# Altium PCB BRAKE PCB PROFILE (Right).PcbDoc
Units mm, origin at the board's own origin, x right, y up, seen from the top; angles counter-clockwise.
Board outline 198.6 x 90.6 mm, 2 copper layers (Top Layer, Bottom Layer); 79 components, 80 nets, 288 pads, 29 vias.
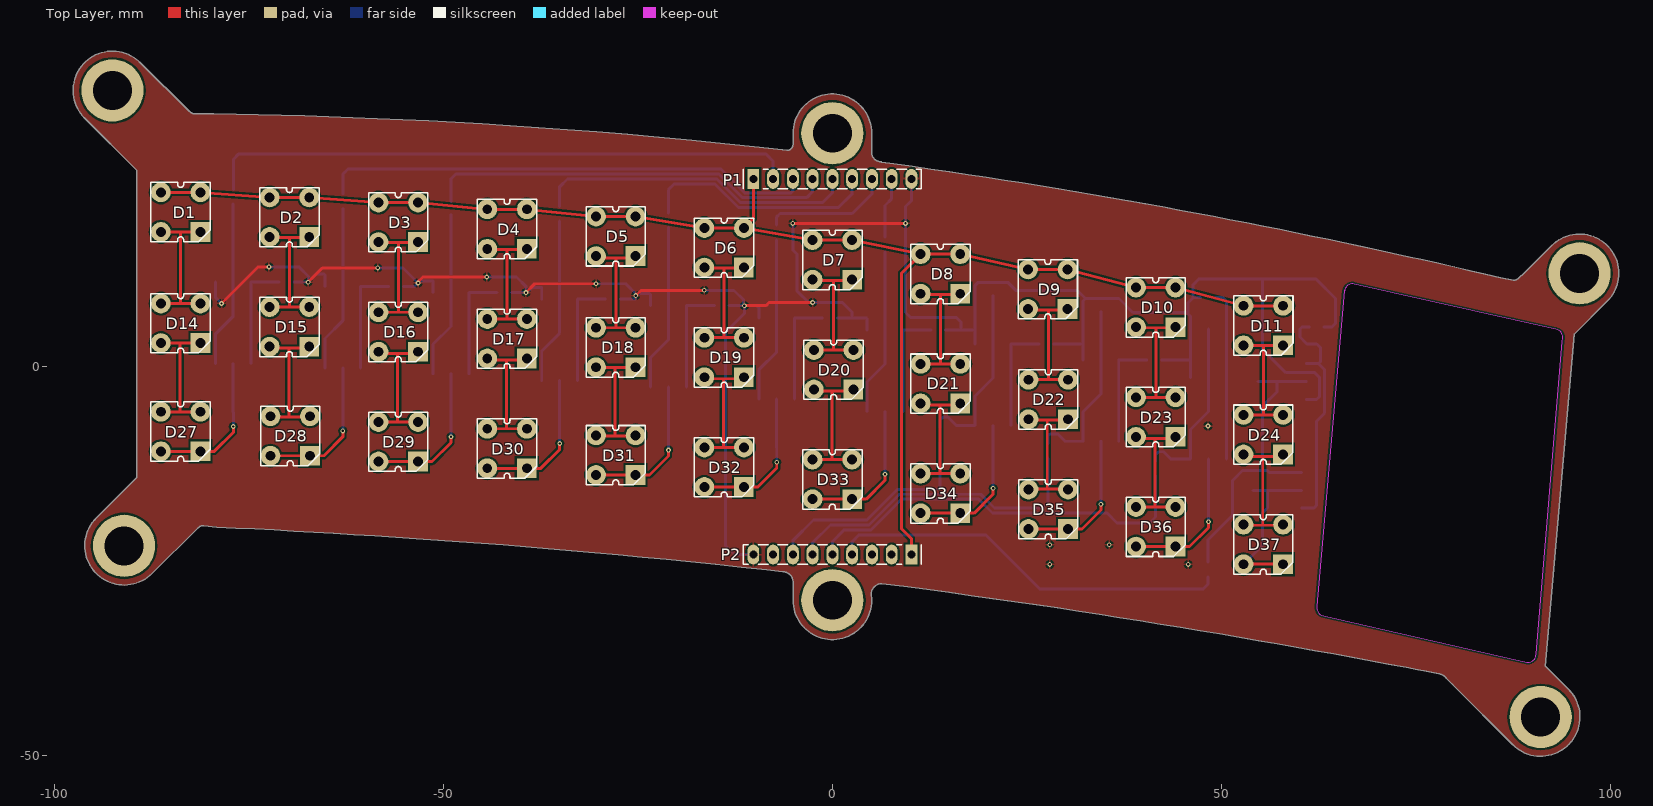
[diagram p0: Top Layer view]
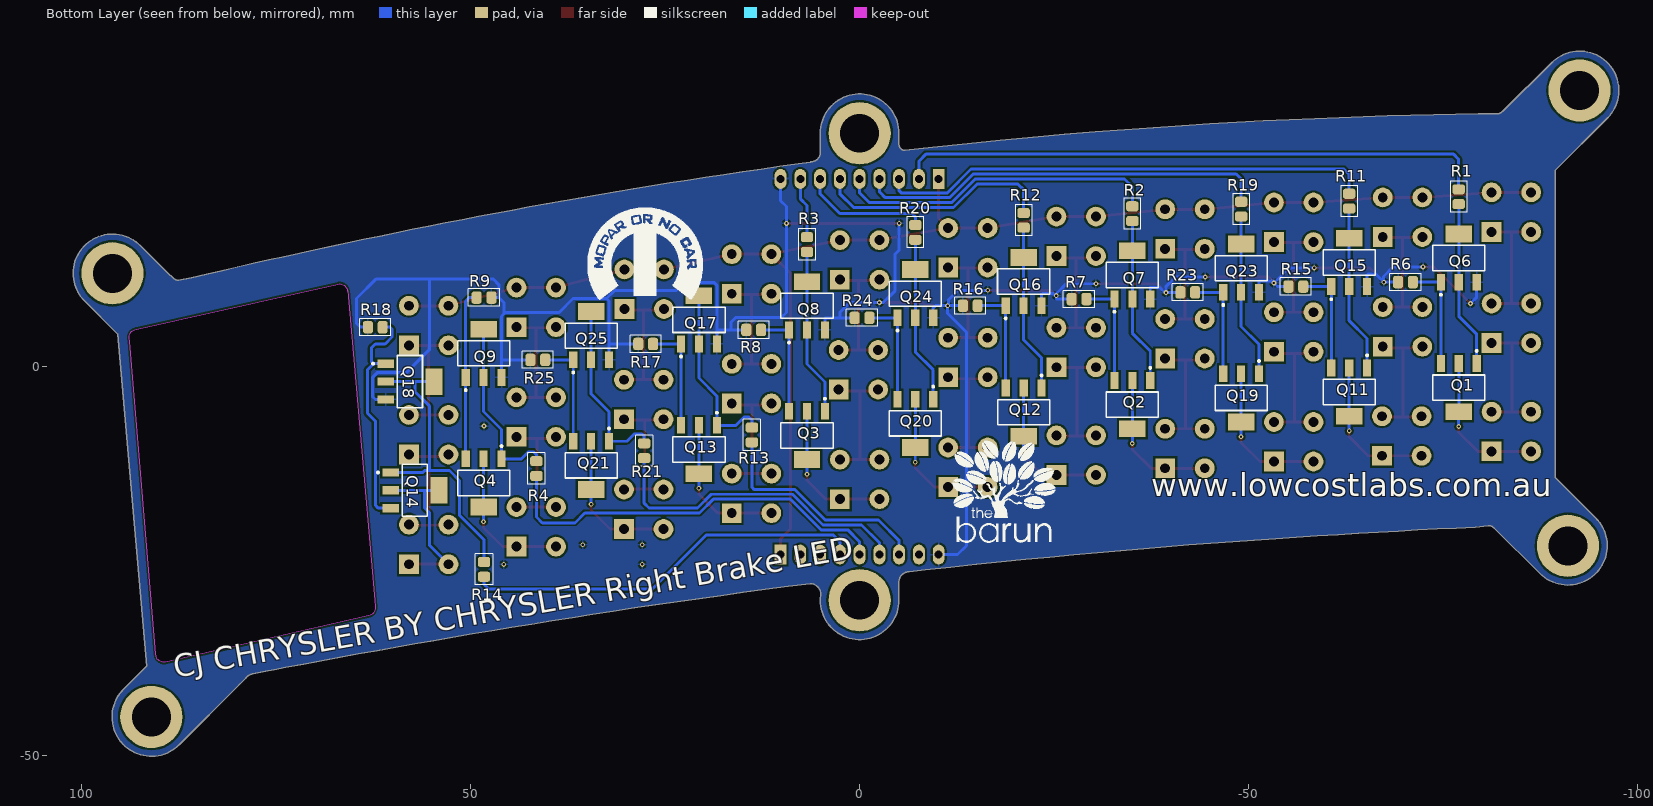
[diagram p1: Bottom Layer view, seen from below]
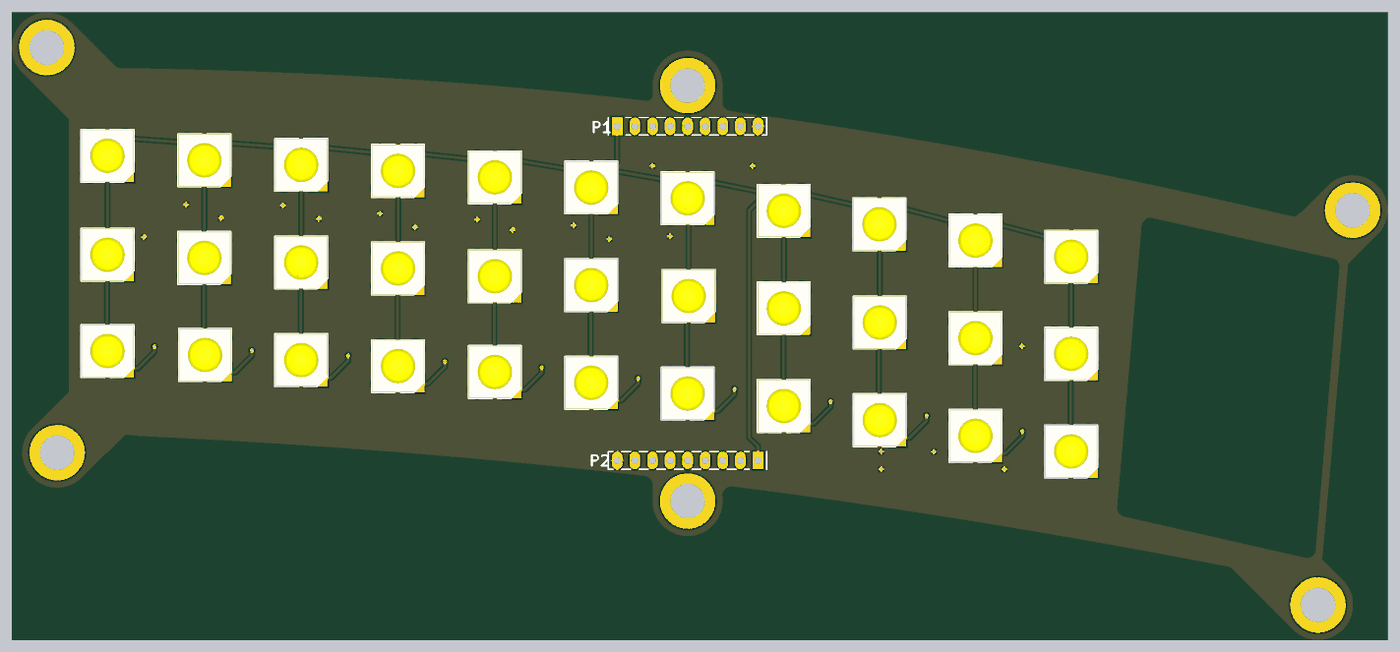
[diagram p2: 3D render of the assembled board from above, using the file's embedded part models]
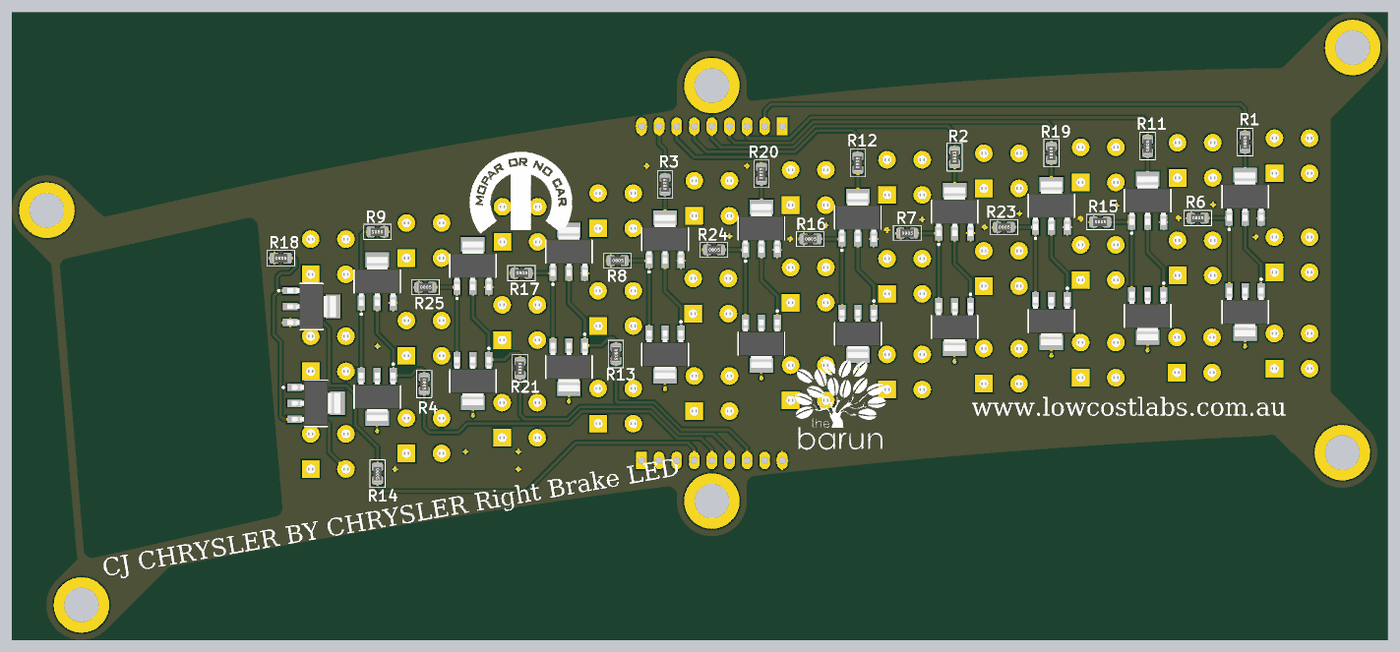
[diagram p3: 3D render of the assembled board from below, using the file's embedded part models]

## Layer stack, top to bottom
Top Solder: solder mask 0.0102, Solder Resist, Dk 3.5
Top Layer: signal copper 0.0356
Dielectric 1: dielectric 0.32, FR-4, Dk 4.8
Bottom Layer: signal copper 0.0356
Bottom Solder: solder mask 0.0102, Solder Resist, Dk 3.5

## Board outline
401 vertices, not listed, extent -97.549,-50.049 101.05,40.549
cut-out: 62.895,-31.924 63.388,-32.065 89.229,-37.941 ccw(c89.408,-36.957) 90.408,-36.957 93.795,3.307 93.823,3.646 ccw(c92.837,3.81) 92.961,4.802 92.601,4.907 67.045,10.622 ccw(c66.802,9.652) 65.81,9.776 65.786,9.778 62.265,-30.792 ccw(c63.246,-30.988)

## Design rules (kind name [scope] priority, off if disabled: settings)
Clearance [All] p1: gap=0.254
PolygonConnect [All] p1: connectstyle=Relief reliefconductorwidth=0.254 reliefentries=4 polygonreliefangle="90 Angle" airgapwidth=0.254
RoomDefinition Indicator [InComponentClass('Indicator')] p1: confinementstyle=ConfineIn formatcopy=TRUE lockcomponents=FALSE outline -110.363,-55.753 132.461,-55.753 132.461,52.705 -110.363,52.705
RoutingVias [All] p1: holewidth=0.711 width=1.27 viastyle="Through Hole" minholewidth=0.305 minwidth=0.61 maxholewidth=0.711 maxwidth=1.27
SolderMaskExpansion [All] p1: expansion=0.102
Width [All] p1: maxlimit=2.54 minlimit=0.254 preferedwidth=0.254
30 further rules are at their usual default settings.

## Components (designator, comment, footprint, x,y, rotation, side; value= is the part's Value field where it differs from the comment)
D1 "AMBER" "CREE P4 YELLOW" -83.743,19.869 r180 top
D2 "AMBER" "CREE P4 YELLOW" -69.758,19.213 r180 top
D3 "AMBER" "CREE P4 YELLOW" -55.774,18.558 r180 top
D4 "AMBER" "CREE P4 YELLOW" -41.8,17.69 r180 top
D5 "AMBER" "CREE P4 YELLOW" -27.826,16.757 r180 top
D6 "AMBER" "CREE P4 YELLOW" -13.913,15.284 r180 top
D7 "AMBER" "CREE P4 YELLOW" 0,13.726 r180 top
D8 "AMBER" "CREE P4 YELLOW" 13.884,11.924 r180 top
D9 "AMBER" "CREE P4 YELLOW" 27.686,9.965 r180 top
D10 "AMBER" "CREE P4 YELLOW" 41.551,7.626 r180 top
D11 "AMBER" "CREE P4 YELLOW" 55.372,5.291 r180 top
D14 "AMBER" "CREE P4 YELLOW" -83.743,5.581 r180 top
D15 "AMBER" "CREE P4 YELLOW" -69.758,5.119 r180 top
D16 "AMBER" "CREE P4 YELLOW" -55.774,4.463 r180 top
D17 "AMBER" "CREE P4 YELLOW" -41.8,3.596 r180 top
D18 "AMBER" "CREE P4 YELLOW" -27.826,2.469 r180 top
D19 "AMBER" "CREE P4 YELLOW" -13.913,1.19 r180 top
D20 "AMBER" "CREE P4 YELLOW" 0.155,-0.388 r180 top
D21 "AMBER" "CREE P4 YELLOW" 13.884,-2.17 r180 top
D22 "AMBER" "CREE P4 YELLOW" 27.734,-4.207 r180 top
D23 "AMBER" "CREE P4 YELLOW" 41.551,-6.468 r180 top
D24 "AMBER" "CREE P4 YELLOW" 55.367,-8.729 r180 top
D27 "AMBER" "CREE P4 YELLOW" -83.743,-8.329 r180 top
D28 "AMBER" "CREE P4 YELLOW" -69.661,-8.896 r180 top
D29 "AMBER" "CREE P4 YELLOW" -55.774,-9.64 r180 top
D30 "AMBER" "CREE P4 YELLOW" -41.8,-10.508 r180 top
D31 "AMBER" "CREE P4 YELLOW" -27.826,-11.356 r180 top
D32 "AMBER" "CREE P4 YELLOW" -13.913,-12.914 r180 top
D33 "AMBER" "CREE P4 YELLOW" 0,-14.472 r180 top
D34 "AMBER" "CREE P4 YELLOW" 13.884,-16.273 r180 top
D35 "AMBER" "CREE P4 YELLOW" 27.734,-18.311 r180 top
D36 "AMBER" "CREE P4 YELLOW" 41.551,-20.572 r180 top
D37 "AMBER" "CREE P4 YELLOW" 55.367,-22.832 r180 top
P1 "Header 9" "HEADER 1x9" 0,24.13 r0 top
P2 "Header 9" "HEADER 1x9" 0,-24.13 r180 top
Q1 "BCP56" SOT223 -76.984,-2.689 r0 bottom
Q2 "BCP56" SOT223 -35.042,-4.868 r0 bottom
Q3 "BCP56" SOT223 6.759,-8.832 r0 bottom
Q4 "BCP56" SOT223 48.31,-14.932 r0 bottom
Q6 "BCP56" SOT223 -76.984,13.97 r180 bottom
Q7 "BCP56" SOT223 -35.042,11.791 r180 bottom
Q8 "BCP56" SOT223 6.759,7.827 r180 bottom
Q9 "BCP56" SOT223 48.31,1.727 r180 bottom
Q11 "BCP56" SOT223 -62.902,-3.256 r0 bottom
Q12 "BCP56" SOT223 -21.082,-5.842 r0 bottom
Q13 "BCP56" SOT223 20.642,-10.633 r0 bottom
Q14 "BCP56" SOT223 57.15,-15.875 r270 bottom
Q15 "BCP56" SOT223 -62.902,13.403 r180 bottom
Q16 "BCP56" SOT223 -21.067,10.942 r180 bottom
Q17 "BCP56" SOT223 20.642,6.025 r180 bottom
Q18 "BCP56" SOT223 57.785,-1.905 r270 bottom
Q19 "BCP56" SOT223 -49.015,-4 r0 bottom
Q20 "BCP56" SOT223 -7.154,-7.274 r0 bottom
Q21 "BCP56" SOT223 34.493,-12.671 r0 bottom
Q23 "BCP56" SOT223 -49.015,12.659 r180 bottom
Q24 "BCP56" SOT223 -7.154,9.385 r180 bottom
Q25 "BCP56" SOT223 34.493,3.988 r180 bottom
R1 "1k" "RESISTOR 0805" -76.962,21.844 r90 bottom
R2 "1k" "RESISTOR 0805" -35.042,19.665 r90 bottom
R3 "1k" "RESISTOR 0805" 6.759,15.701 r90 bottom
R4 "1k" "RESISTOR 0805" 41.529,-13.081 r270 bottom
R6 "8R2" "RESISTOR 0805" -70.134,10.87 r180 bottom
R7 "8R2" "RESISTOR 0805" -28.191,8.691 r180 bottom
R8 "8R2" "RESISTOR 0805" 13.609,4.727 r180 bottom
R9 "8R2" "RESISTOR 0805" 48.26,8.89 r0 bottom
R11 "1k" "RESISTOR 0805" -62.902,21.277 r90 bottom
R12 "1k" "RESISTOR 0805" -21.067,18.816 r90 bottom
R13 "1k" "RESISTOR 0805" 13.843,-8.763 r270 bottom
R14 "1k" "RESISTOR 0805" 48.26,-26.035 r270 bottom
R15 "8R2" "RESISTOR 0805" -56.051,10.303 r180 bottom
R16 "8R2" "RESISTOR 0805" -14.217,7.842 r180 bottom
R17 "8R2" "RESISTOR 0805" 27.493,2.925 r180 bottom
R18 "8R2" "RESISTOR 0805" 62.23,5.08 r180 bottom
R19 "1k" "RESISTOR 0805" -49.022,20.254 r90 bottom
R20 "1k" "RESISTOR 0805" -7.154,17.259 r90 bottom
R21 "1k" "RESISTOR 0805" 27.686,-10.795 r270 bottom
R23 "8R2" "RESISTOR 0805" -42.164,9.559 r180 bottom
R24 "8R2" "RESISTOR 0805" -0.304,6.285 r180 bottom
R25 "8R2" "RESISTOR 0805" 41.344,0.888 r180 bottom

## Footprints (in the part's own frame and the unit in brackets; to place one, negate y for a bottom-side part, rotate by r counter-clockwise, add the part's x,y. Pads: shape width x height; smd on the part's side, far side on the other; paste and mask are expansions set on the pad)
"CREE P4 YELLOW" [mm] "CREE P4 YELLOW"
  rect 2.54x2.54 hole 1.27: 1(-2.54,2.54)
  round 2.54 hole 1.27: 2(-2.54,-2.54) 3(2.54,-2.54) 4(2.54,2.54)
  silkscreen extent -3.81,-3.81 3.81,3.81, body extent -3.81,-3.81 3.81,3.81, height 6.91
"HEADER 1x9" [mil]
  rect 60x100 hole 40: 1(-400,0)
  oval 60x100 hole 40: 2(-300,0) 3(-200,0) 4(-100,0) 5(0,0) 6(100,0) 7(200,0) 8(300,0) 9(400,0)
  silkscreen extent -450,-50 450,50
"RESISTOR 0805" [mm]
  rrect50% 1.3x1.6 smd: 1(-0.95,0) 2(0.95,0)
  silkscreen extent -2,-1.1 2,1.1, body extent -1.25,-0.62 1.25,0.62, height 0.8
SOT223 [mm] "SOT-223/SC-73; 4 Leads; Body 6.7 x 7.3 mm, inc. leads (LxW max)"
  rect 1.05x2.15 smd: 1(-2.3,-3.1) 2(0,-3.1) 3(2.3,-3.1)
  rect 3.4x2.15 smd: 2(0,3.1)
  silkscreen extent -3.35,-4.85 3.35,1.62, body extent -3.25,-3.5 3.25,3.5, height 1.67

## Part data
D1 D2 D3 D4 D5 D6 D7 D8 D9 D10 D11 D14 D15 D16 D17 D18 D19 D20 D21 D22 D23 D24 D27 D28 D29 D30 D31 D32 D33 D34 D35 D36 D37: library part CP41B-AFSCM0Q0264, "CREE AMBER LED P4 (SUPERFLUX)"
P1 P2: "Header, 9-Pin"
Q1 Q2 Q3 Q4 Q6 Q7 Q8 Q9 Q11 Q12 Q13 Q14 Q15 Q16 Q17 Q18 Q19 Q20 Q21 Q23 Q24 Q25: library part NPN, "BCP56 80 V, 1 A NPN medium power transistors"
R1 R2 R3 R4 R6 R7 R8 R9 R11 R12 R13 R14 R15 R16 R17 R18 R19 R20 R21 R23 R24 R25: library part Res2, "Resistor"

## Free pads (board coordinates)
  round 8 hole 5 unplated: MOUNT(-92.5,35.5) MOUNT(-91.008,-23.011) MOUNT(0,-30) MOUNT(0,30) MOUNT(91,-45) MOUNT(96,12)

## Via types
v1: diameter 0.61, hole 0.305, Top Layer to Bottom Layer, 29 vias

## Nets (pads, with @x,y where several pads share a name; then routed paths per layer and width w, separated by ;. In a path a pad name is that pad's centre, name@x,y a point inside that pad or via, vN(x,y) a via of type N, cw(c..) or ccw(c..) an arc to the next point about the centre after c; other vN are vias at no path point)
DRIVE_0: P1.2 R1.2 | length 76.1
  Bottom Layer w0.381: R1.2 -76.962,26.67 -76.327,27.305 -8.509,27.305 -7.62,26.416 P1.2
DRIVE_1: P1.3 R11.2 | length 63.5
  Bottom Layer w0.381: R11.2 -62.902,24.728 -62.23,25.4 -14.324,25.4 -11.276,22.352 -5.334,22.352 -5.08,22.606 P1.3
DRIVE_2: P1.4 R19.2 | length 52.9
  Bottom Layer w0.381: R19.2 -49.022,24.13 -48.387,24.765 -14.587,24.765 -11.539,21.717 -3.302,21.717 -2.54,22.479 P1.4
DRIVE_3: P1.5 R2.2 | length 41.5
  Bottom Layer w0.381: R2.2 -35.042,23.124 -34.036,24.13 -14.85,24.13 -11.802,21.082 -1.27,21.082 0,22.352 P1.5
DRIVE_4: P1.6 R12.2 | length 30.8
  Bottom Layer w0.381: R12.2 -21.082,19.781 -21.082,22.733 -20.32,23.495 -15.113,23.495 -12.065,20.447 0.762,20.447 2.54,22.225 P1.6
DRIVE_5: P1.7 R20.2 | length 16.4
  Bottom Layer w0.381: R20.2 -7.154,19.262 -6.731,19.685 2.54,19.685 5.08,22.225 P1.7
DRIVE_6: P1.8 R3.2 | length 7.8
  Bottom Layer w0.381: R3.2 6.759,20.729 7.62,21.59 P1.8
DRIVE_7: P2.7 R13.2 | length 29.3
  Bottom Layer w0.381: P2.7 -5.08,-22.352 -2.413,-19.685 4.427,-19.685 8.364,-15.748 13.589,-15.748 13.843,-15.494 R13.2
DRIVE_8: P2.6 R21.2 | length 41.1
  Bottom Layer w0.381: P2.6 -2.54,-22.606 -0.254,-20.32 4.69,-20.32 8.627,-16.383 19.059,-16.383 20.837,-18.161 27.051,-18.161 27.686,-17.526 R21.2
DRIVE_9: P2.5 R4.2 | length 52.3
  Bottom Layer w0.381: P2.5 0,-22.479 1.524,-20.955 4.953,-20.955 8.89,-17.018 18.796,-17.018 20.574,-18.796 35.306,-18.796 36.576,-20.066 40.767,-20.066 41.529,-19.304 R4.2
DRIVE_10: P2.4 R14.2 | length 51.9
  Bottom Layer w0.381: P2.4 2.54,-22.479 3.429,-21.59 19.685,-21.59 26.67,-28.575 47.625,-28.575 48.26,-27.94 R14.2
DRIVE_11: P2.3
DRIVE_12: P2.2
GND: P1.9 P2.9 Q6.3 Q7.3 Q8.3 Q9.3 Q15.3 Q16.3 Q17.3 Q18.3 Q23.3 Q24.3 Q25.3 R6.1 R7.1 R8.1 R9.1 R15.1 R16.1 R17.1 R18.1 R23.1 R24.1 R25.1 | length 331.5
  Top Layer w0.381: v1(-78.486,8.128) -73.787,12.827 v1(-72.39,12.827) ; v1@-67.31,10.922 -65.532,12.7 v1(-58.42,12.7) ; v1@-53.213,10.922 -52.606,11.529 v1(-44.4,11.529) ; v1(-39.37,9.525) -38.234,10.661 v1(-30.364,10.661) ; v1(-25.273,9.144) -24.604,9.813 v1(-16.453,9.813) ; v1(-11.303,7.842) -11.303,7.874 -8.509,7.874 -8.128,8.255 v1(-2.54,8.255) ; v1(-5.08,18.415) v1(9.398,18.415)
  Bottom Layer w0.381: Q6.3 -79.284,8.926 v1(-78.486,8.128) ; v1(-72.39,12.827) v1@-72.383,12.827 ; v1@-72.37,12.84 -68.56,12.84 -67.315,11.595 v1@-67.315,10.917 ; R6.1 v1(-67.362,10.87) ; Q15.3 -65.202,11.76 -65.379,11.938 -66.294,11.938 v1@-67.315,10.917 ; v1(-58.42,12.7) -55.171,12.7 v1(-53.233,10.762) ; R15.1 -53.692,10.303 v1(-53.233,10.762) ; Q23.3 -51.315,11.042 -52.952,11.042 v1(-53.233,10.762) ; v1(-44.4,11.529) -40.59,11.529 -39.346,10.284 v1@-39.346,9.559 ; R23.1 -41.181,9.525 v1(-39.37,9.525) -39.243,9.525 -38.604,10.164 -37.342,10.164 Q7.3 ; v1(-30.364,10.661) -26.554,10.661 v1@-25.309,9.417 ; R7.1 -25.309,8.691 -25.309,8.981 -24.892,9.398 -23.495,9.398 -23.367,9.27 Q16.3 ; v1(-16.453,9.813) -12.643,9.813 -11.398,8.568 v1@-11.398,7.842 ; R16.1 v1@-11.398,7.842 ; P2.9 -12.573,-24.13 -13.716,-22.987 -13.716,4.445 -11.303,6.858 v1(-11.303,7.842) ; Q24.3 -9.454,7.549 -9.747,7.842 v1(-11.303,7.842) ; v1(-5.08,18.415) -5.08,14.986 -4.572,14.478 -4.572,9.779 -3.048,8.255 v1(-2.54,8.255) 1.27,8.255 2.515,7.01 2.515,6.285 ; R24.1 2.515,6.285 ; Q8.3 4.459,6.209 4.383,6.285 2.515,6.285 ; P1.9 10.16,21.336 9.398,20.574 v1(9.398,18.415) 9.398,6.985 10.033,6.35 15.875,6.35 16.51,5.715 16.51,4.727 ; R8.1 16.51,4.727 ; Q17.3 18.342,4.699 ; R17.1 32.189,2.925 32.193,2.921 ; Q25.3 32.193,2.921 ; R25.1 46.009,0.888 46.01,0.889 ; Q9.3 46.01,0.889 ; R9.1 46.355,8.89 ; Q18.3 62.216,-4.205 62.611,-3.81 62.611,-1.402 61.976,-0.767 58.262,-0.767 55.245,2.25 55.245,11.303 ; R18.1 64.135,5.08 64.643,5.588 64.643,8.763 62.103,11.303 55.245,11.303 ; v1(-67.362,10.87) -67.315,10.87 v1@-67.315,10.917 ; v1(-67.362,10.87) v1@-67.315,10.917 ; v1@-11.398,7.842 v1(-11.303,7.842) ; 16.51,4.727 18.314,4.727 18.342,4.699 ; 18.342,4.699 18.342,10.468 18.669,10.795 22.606,10.795 23.622,9.779 31.496,9.779 32.512,8.763 ; 32.193,2.921 32.193,8.444 32.512,8.763 ; 32.512,8.763 36.83,8.763 38.608,6.985 45.502,6.985 45.72,6.767 ; 45.72,6.767 46.01,6.477 46.01,0.889 ; 45.72,6.767 45.72,8.255 46.355,8.89 ; 46.355,8.89 46.355,10.541 47.117,11.303 55.245,11.303
  other v1: 27.94,-25.4 45.72,-25.4 27.94,-22.86 35.56,-22.86 48.26,-7.62
NetD1_1: D1.1 D1.4 D14.2 D14.3 | length 19.4
  Top Layer w0.381: D14.3 -83.743,8.121 ; D1.4 -83.743,17.329 ; D14.2 -83.743,8.121 ; D1.1 -83.743,17.329 ; -83.743,8.121 -83.743,17.329
NetD2_1: D2.1 D2.4 D15.2 D15.3 | length 19.1
  Top Layer w0.381: D15.3 -69.753,7.659 ; D2.4@-72.293,16.599 -69.753,16.599 ; D15.2@-67.218,7.391 D15.2@-67.213,7.391 ; D15.2 -69.753,7.659 ; D2.1@-67.213,16.599 -69.753,16.599 ; -69.753,7.659 -69.753,16.599
NetD3_1: D3.1 D3.4 D16.2 D16.3 | length 19.1
  Top Layer w0.381: D16.3 -55.769,7.003 ; D3.4@-58.309,15.943 -55.769,15.943 ; D16.2@-53.234,6.736 D16.2@-53.229,6.736 ; D16.2 -55.769,7.003 ; D3.1@-53.229,15.943 -55.769,15.943 ; -55.769,7.003 -55.769,15.943
NetD4_1: D4.1 D4.4 D17.2 D17.3 | length 19.1
  Top Layer w0.381: D17.3 -41.795,6.136 ; D4.4@-44.335,15.076 -41.795,15.076 ; D17.2@-39.26,5.868 D17.2@-39.255,5.868 ; D17.2 -41.795,6.136 ; D4.1@-39.255,15.076 -41.795,15.076 ; -41.795,6.136 -41.795,15.076
NetD5_1: D5.1 D5.4 D18.2 D18.3 | length 19.1
  Top Layer w0.381: D18.3 -27.821,5.009 ; D5.4@-30.361,13.949 -27.821,13.949 ; D18.2@-25.286,4.741 D18.2@-25.281,4.741 ; D18.2 -27.821,5.009 ; D5.1@-25.281,13.949 -27.821,13.949 ; -27.821,5.009 -27.821,13.949
NetD6_1: D6.1 D6.4 D19.2 D19.3 | length 19.1
  Top Layer w0.381: D19.3 -13.908,3.73 ; D6.4@-16.448,12.67 -13.908,12.67 ; D19.2@-11.373,3.462 D19.2@-11.368,3.462 ; D19.2 -13.908,3.73 ; D6.1@-11.368,12.67 -13.908,12.67 ; -13.908,3.73 -13.908,12.67
NetD7_1: D7.1 D7.4 D20.2 D20.3 | length 19.1
  Top Layer w0.381: D20.3 0.16,2.152 ; D7.4@-2.38,11.092 0.16,11.092 ; D20.2@2.695,1.884 D20.2@2.7,1.884 ; D20.2 0.16,2.152 ; D7.1@2.7,11.092 0.16,11.092 ; 0.16,2.152 0.16,11.092
NetD8_1: D8.1 D8.4 D21.2 D21.3 | length 19.1
  Top Layer w0.381: D21.3 13.889,0.37 ; D8.4@11.349,9.31 13.889,9.31 ; D21.2@16.424,0.102 D21.2@16.429,0.102 ; D21.2 13.889,0.37 ; D8.1@16.429,9.31 13.889,9.31 ; 13.889,0.37 13.889,9.31
NetD9_1: D9.1 D9.4 D22.2 D22.3 | length 19.1
  Top Layer w0.381: D22.3 27.739,-1.667 ; D9.4@25.199,7.273 27.739,7.273 ; D22.2@30.274,-1.935 D22.2@30.279,-1.935 ; D22.2 27.739,-1.667 ; D9.1@30.279,7.273 27.739,7.273 ; 27.739,-1.667 27.739,7.273
NetD10_1: D10.1 D10.4 D23.2 D23.3 | length 19.1
  Top Layer w0.381: D23.3 41.556,-3.928 ; D10.4@39.016,5.012 41.556,5.012 ; D23.2@44.091,-4.196 D23.2@44.096,-4.196 ; D23.2 41.556,-3.928 ; D10.1@44.096,5.012 41.556,5.012 ; 41.556,-3.928 41.556,5.012
NetD11_1: D11.1 D11.4 D24.2 D24.3 | length 19.1
  Top Layer w0.381: D24.3 55.372,-6.189 ; D11.4 55.372,2.751 ; D24.2@57.907,-6.457 D24.2@57.912,-6.457 ; D24.2 55.372,-6.189 ; D11.1 55.372,2.751 ; 55.372,-6.189 55.372,2.751
NetD12_1: 
NetD13_1: 
NetD14_1: D14.1 D14.4 D27.2 D27.3 | length 19
  Top Layer w0.381: D27.3 -83.82,-5.789 ; D14.4 -83.82,3.041 ; D27.2 -83.82,-5.789 ; D14.1 -83.82,3.041 ; -83.82,-5.789 -83.82,3.041
NetD15_1: D15.1 D15.4 D28.2 D28.3 | length 19
  Top Layer w0.381: D28.3@-72.298,-6.445 -69.835,-6.445 ; D15.4@-72.298,2.385 -69.835,2.385 ; D28.2@-67.218,-6.445 -69.835,-6.445 ; D15.1@-67.218,2.385 -69.835,2.385 ; -69.835,-6.445 -69.835,2.385
NetD16_1: D16.1 D16.4 D29.2 D29.3 | length 19
  Top Layer w0.381: D29.3 -55.851,-7.1 ; D16.4@-58.314,1.73 -55.851,1.73 ; D29.2 -55.851,-7.1 ; D16.1@-53.234,1.73 -55.851,1.73 ; -55.851,-7.1 -55.851,1.73
NetD17_1: D17.1 D17.4 D30.2 D30.3 | length 19
  Top Layer w0.381: D30.3 -41.878,-7.968 ; D17.4@-44.34,0.862 -41.878,0.862 ; D30.2 -41.878,-7.968 ; D17.1@-39.26,0.862 -41.878,0.862 ; -41.878,-7.968 -41.878,0.862
NetD18_1: D18.1 D18.4 D31.2 D31.3 | length 19
  Top Layer w0.381: D31.3@-30.366,-8.901 -27.903,-8.901 ; D18.4 -27.903,-0.071 ; D31.2@-25.286,-8.901 -27.903,-8.901 ; D18.1 -27.903,-0.071 ; -27.903,-8.901 -27.903,-0.071
NetD19_1: D19.1 D19.4 D32.2 D32.3 | length 19
  Top Layer w0.381: D32.3 -13.99,-10.374 ; D19.4@-16.453,-1.544 -13.99,-1.544 ; D32.2 -13.99,-10.374 ; D19.1@-11.373,-1.544 -13.99,-1.544 ; -13.99,-10.374 -13.99,-1.544
NetD20_1: D20.1 D20.4 D33.2 D33.3 | length 19
  Top Layer w0.381: D33.3 -0.077,-11.932 ; D20.4@-2.54,-3.102 -0.077,-3.102 ; D33.2 -0.077,-11.932 ; D20.1@2.54,-3.102 -0.077,-3.102 ; -0.077,-11.932 -0.077,-3.102
NetD21_1: D21.1 D21.4 D34.2 D34.3 | length 19
  Top Layer w0.381: D34.3 13.806,-13.733 ; D21.4@11.344,-4.904 13.806,-4.904 ; D34.2 13.806,-13.733 ; D21.1@16.424,-4.904 13.806,-4.904 ; 13.806,-13.733 13.806,-4.904
NetD22_1: D22.1 D22.4 D35.2 D35.3 | length 19
  Top Layer w0.381: D35.3@25.146,-15.693 27.609,-15.693 ; D22.4@25.146,-6.863 27.609,-6.863 ; D35.2@30.226,-15.693 27.609,-15.693 ; D22.1@30.226,-6.863 27.609,-6.863 ; 27.609,-15.693 27.609,-6.863
NetD23_1: D23.1 D23.4 D36.2 D36.3 | length 19
  Top Layer w0.381: D36.3 41.474,-18.032 ; D23.4@39.011,-9.202 41.474,-9.202 ; D36.2 41.474,-18.032 ; D23.1@44.091,-9.202 41.474,-9.202 ; 41.474,-18.032 41.474,-9.202
NetD24_1: D24.1 D24.4 D37.2 D37.3 | length 19
  Top Layer w0.381: D37.3@52.832,-20.367 55.295,-20.367 ; D24.4@52.832,-11.537 55.295,-11.537 ; D37.2@57.912,-20.367 55.295,-20.367 ; D24.1@57.912,-11.537 55.295,-11.537 ; 55.295,-20.367 55.295,-11.537
NetD25_1: 
NetD26_1: 
NetQ1_1: Q1.1 Q6.2 R1.1 | length 25.3
  Bottom Layer w0.254: Q6.2@-76.984,17.07 R1.1@-76.984,20.894
  Bottom Layer w0.381: Q1.1 -79.284,4.189 -76.984,6.489 -76.984,10.87 -76.984,17.07 R1.1@-76.984,20.894
NetQ1_3: Q1.3 Q6.1 R6.2 | length 42.2
  Bottom Layer w0.254: Q6.1 Q1.3 Q6.1 ; Q6.1 R6.2 Q6.1
  Bottom Layer w0.381: Q1.3 Q6.1 R6.2
NetQ2_1: Q2.1 Q7.2 R2.1 | length 25.3
  Bottom Layer w0.254: Q7.2@-35.042,14.891 R2.1
  Bottom Layer w0.381: Q2.1 -37.342,2.01 -35.042,4.31 -35.042,8.691 -35.042,14.891 R2.1
NetQ2_3: Q2.3 Q7.1 R7.2 | length 42.2
  Bottom Layer w0.254: Q7.1 Q2.3 Q7.1 ; Q7.1 R7.2 Q7.1
  Bottom Layer w0.381: Q2.3 Q7.1 R7.2
NetQ3_1: Q3.1 Q8.2 R3.1 | length 21.4
  Bottom Layer w0.381: Q3.1 4.459,-1.954 6.759,0.346 6.759,4.727 6.759,10.927 R3.1
NetQ3_3: Q3.3 Q8.1 R8.2 | length 28.1
  Bottom Layer w0.254: Q3.3 Q8.1 R8.2
  Bottom Layer w0.381: Q3.3 Q8.1 R8.2
NetQ4_1: Q4.1 Q9.2 R4.1 | length 23.5
  Bottom Layer w0.381: R4.1 41.529,-11.303 41.91,-10.922 42.545,-10.922 43.455,-11.832 Q4.1 46.01,-8.054 48.31,-5.754 48.31,-1.373 Q9.2@48.31,4.827
NetQ4_3: Q4.3 Q9.1 R9.2 | length 21.9
  Bottom Layer w0.381: R9.2 50.165,8.89 50.61,8.445 Q9.1 Q4.3
NetQ5_1: 
NetQ5_3: 
NetQ11_1: Q11.1 Q15.2 R11.1 | length 25.3
  Bottom Layer w0.254: Q15.2@-62.902,16.503 R11.1
  Bottom Layer w0.381: Q11.1 -65.202,3.622 -62.902,5.922 -62.902,10.303 -62.902,16.503 R11.1
NetQ11_3: Q11.3 Q15.1 R15.2 | length 42.2
  Bottom Layer w0.254: Q15.1 Q11.3 Q15.1 ; Q15.1 R15.2 Q15.1
  Bottom Layer w0.381: Q11.3 Q15.1 R15.2
NetQ12_1: Q12.1 Q16.2 R12.1 | length 25.3
  Bottom Layer w0.254: Q16.2@-21.067,14.042 R12.1
  Bottom Layer w0.381: Q12.1@-23.367,-2.616 -23.367,1.161 -21.067,3.461 -21.067,7.842 -21.067,14.042 R12.1
NetQ12_3: Q12.3 Q16.1 R16.2 | length 42.2
  Bottom Layer w0.254: Q16.1 -18.767,-2.616 Q16.1 ; Q16.1 R16.2 Q16.1
  Bottom Layer w0.381: Q12.3@-18.767,-2.616 Q16.1 R16.2
NetQ13_1: Q13.1 Q17.2 R13.1 | length 23.7
  Bottom Layer w0.381: R13.1 13.843,-6.858 14.224,-6.477 14.859,-6.477 15.915,-7.533 Q13.1 18.342,-3.756 20.642,-1.456 20.642,2.925 Q17.2@20.642,9.126
NetQ13_3: Q13.3 Q17.1 R17.2 | length 14.1
  Bottom Layer w0.381: Q13.3 Q17.1 R17.2
NetQ14_1: Q14.1 Q18.2 R14.1 | length 39.7
  Bottom Layer w0.381: R14.1 48.26,-22.225 51.435,-19.05 51.435,-14.605 52.705,-13.335 55.245,-13.335 ; Q18.2@54.685,-1.905 57.15,-1.905 ; Q14.1 56.12,-13.575 55.88,-13.335 55.245,-13.335 ; Q18.2@60.885,-1.905 57.15,-1.905 ; 55.245,-13.335 55.245,-5.08 57.15,-3.175 57.15,-1.905
NetQ14_3: Q14.3 Q18.1 R18.2 | length 30.4
  Bottom Layer w0.381: Q14.3 61.835,-18.175 62.23,-17.78 62.23,-6.985 63.246,-5.969 63.246,-0.381 62.47,0.395 ; Q18.1 62.47,0.395 ; R18.2 60.325,5.08 60.071,4.826 60.071,3.81 60.96,2.921 62.23,2.921 62.738,2.413 62.738,0.663 62.47,0.395
NetQ19_1: Q19.1 Q23.2 R19.1 | length 25.3
  Bottom Layer w0.254: Q23.2@-49.015,15.759 R19.1@-49.015,19.583
  Bottom Layer w0.381: Q19.1 -51.315,2.878 -49.015,5.178 -49.015,9.559 -49.015,15.759 R19.1@-49.015,19.583
NetQ19_3: Q19.3 Q23.1 R23.2 | length 42.2
  Bottom Layer w0.254: Q23.1 Q19.3 Q23.1 ; Q23.1 R23.2 Q23.1
  Bottom Layer w0.381: Q19.3 Q23.1 R23.2
NetQ20_1: Q20.1 Q24.2 R20.1 | length 25.3
  Bottom Layer w0.254: Q24.2@-7.154,12.485 R20.1
  Bottom Layer w0.381: Q20.1 -9.454,-0.396 -7.154,1.904 -7.154,6.285 -7.154,12.485 R20.1
NetQ20_3: Q20.3 Q24.1 R24.2 | length 42.2
  Bottom Layer w0.254: Q24.1 Q20.3 Q24.1 ; Q24.1 R24.2 Q24.1
  Bottom Layer w0.381: Q20.3 Q24.1 R24.2
NetQ21_1: Q21.1 Q25.2 R21.1 | length 23.6
  Bottom Layer w0.381: R21.1 27.686,-8.89 27.94,-8.636 28.956,-8.636 29.891,-9.571 Q21.1 32.193,-5.793 34.493,-3.493 34.493,0.888 Q25.2@34.493,7.088
NetQ21_3: Q21.3 Q25.1 R25.2 | length 28.1
  Bottom Layer w0.254: Q21.3 Q25.1 R25.2
  Bottom Layer w0.381: Q21.3 Q25.1 R25.2
NetQ22_1: 
NetQ22_3: 
SINK_0: D27.1 D27.4 Q1.2 | length 19.2
  Top Layer w0.381: D27.4 -79.405,-10.869 -76.976,-8.44 v1(-76.976,-7.678)
  Bottom Layer w0.381: Q1.2@-76.984,0.411 -76.984,-5.789 -76.976,-5.796 v1(-76.976,-7.678)
SINK_1: D28.1 D28.4 Q11.2 | length 19.2
  Top Layer w0.381: D28.4 -65.323,-11.436 -62.894,-9.007 v1(-62.894,-8.245)
  Bottom Layer w0.381: Q11.2@-62.902,-0.156 -62.902,-6.356 -62.894,-6.364 v1(-62.894,-8.245)
SINK_2: D29.1 D29.4 Q19.2 | length 19.2
  Top Layer w0.381: D29.4 -51.436,-12.18 -49.007,-9.751 v1(-49.007,-8.989)
  Bottom Layer w0.381: Q19.2@-49.015,-0.9 -49.015,-7.1 -49.007,-7.108 v1(-49.007,-8.989)
SINK_3: D30.1 D30.4 Q2.2 | length 19.2
  Top Layer w0.381: D30.4 -37.463,-13.048 -35.034,-10.619 v1(-35.034,-9.857)
  Bottom Layer w0.381: Q2.2@-35.042,-1.768 -35.042,-7.968 -35.034,-7.975 v1(-35.034,-9.857)
SINK_4: D31.1 D31.4 Q12.2 | length 19.2
  Top Layer w0.381: D31.4 -23.489,-13.896 -21.06,-11.468 v1(-21.06,-10.706)
  Bottom Layer w0.381: Q12.2@-21.067,-2.616 -21.067,-8.816 -21.06,-8.824 v1(-21.06,-10.706)
SINK_5: D32.1 D32.4 Q20.2 | length 19.2
  Top Layer w0.381: D32.4 -9.575,-15.454 -7.147,-13.025 v1(-7.147,-12.263)
  Bottom Layer w0.381: Q20.2@-7.154,-4.174 -7.154,-10.374 -7.147,-10.382 v1(-7.147,-12.263)
SINK_6: D33.1 D33.4 Q3.2 | length 19.2
  Top Layer w0.381: D33.4 4.338,-17.012 6.766,-14.583 v1(6.766,-13.821)
  Bottom Layer w0.381: Q3.2@6.759,-5.732 6.759,-11.932 6.766,-11.939 v1(6.766,-13.821)
SINK_7: D34.1 D34.4 Q13.2 | length 19.2
  Top Layer w0.381: D34.4 18.221,-18.813 20.65,-16.385 v1(20.65,-15.623)
  Bottom Layer w0.381: Q13.2@20.642,-7.533 20.642,-13.733 20.65,-13.741 v1(20.65,-15.623)
SINK_8: D35.1 D35.4 Q21.2 | length 19.2
  Top Layer w0.381: D35.4 32.072,-20.851 34.501,-18.422 v1(34.501,-17.66)
  Bottom Layer w0.381: Q21.2@34.493,-9.571 34.493,-15.771 34.501,-15.779 v1(34.501,-17.66)
SINK_9: D36.1 D36.4 Q4.2 | length 19.2
  Top Layer w0.381: D36.4 45.888,-23.112 48.317,-20.683 v1(48.317,-19.921)
  Bottom Layer w0.381: Q4.2@48.31,-11.832 48.31,-18.032 48.317,-18.039 v1(48.317,-19.921)
SINK_10: D37.1 D37.4 Q14.2 | length 22
  Top Layer w0.381: D37.4 D37.1
  Bottom Layer w0.381: D37.4 55.245,-22.955 55.245,-18.796 55.88,-18.161 55.88,-15.875 ; Q14.2@54.05,-15.875 55.88,-15.875 ; Q14.2@60.25,-15.875 55.88,-15.875
SINK_11: 
SINK_12: 
V+: D1.2 D1.3 D2.2 D2.3 D3.2 D3.3 D4.2 D4.3 D5.2 D5.3 D6.2 D6.3 D7.2 D7.3 D8.2 D8.3 D9.2 D9.3 D10.2 D10.3 D11.2 D11.3 P1.1 P2.1 | length 192.6
  Top Layer w0.381: D1.3 D1.2 D2.3 D2.2 D3.3 D3.2 D4.3 D4.2 D5.3 D5.2 D6.3 D6.2 ; P1.1 -10.16,19.037 D6.2 ; P2.1 10.16,-22.098 8.89,-20.828 8.89,12.011 D8.3 ; D11.2 D11.3 D10.2 D10.3 D9.2 D9.3 D8.2 D8.3 ; D6.2 D7.3 D7.2 D8.3
pads on no net: P2.8

## Polygon pours and split planes (outlines as drawn)
GND on Top Layer "TOP GND" (solid, remove dead copper, pour order 0): 401 vertices, not listed, extent -97.549,-50.049 101.05,40.549
GND on Bottom Layer "BOTTOM GND" (solid, remove dead copper, pour order 1): 401 vertices, not listed, extent -97.549,-50.049 101.05,40.549

## Silkscreen, mask and mechanical layers (free items; w line width, h text height)
Bottom Overlay:
  drawing of 48 lines, arcs and shapes, not listed
  text "www.lowcostlabs.com.au" at -37.465,-17.653 h5.08
  text "CJ CHRYSLER BY CHRYSLER Right Brake LED" at 87.757,-40.894 h5 r350
Mechanical 1:
  drawing of 162 lines, arcs and shapes, not listed
Mechanical 2:
  drawing of 1280 lines, arcs and shapes, not listed